# Altium PCB PCB3.PcbDoc
Units mil, origin at the board's own origin, x right, y up, seen from the top; angles counter-clockwise.
Board outline 397.64 x 1338.48 mil, 2 copper layers (Top Layer, Bottom Layer); 6 components, 15 nets, 6 pads, 0 vias.
Unrouted connection lines stored in the file: 3.
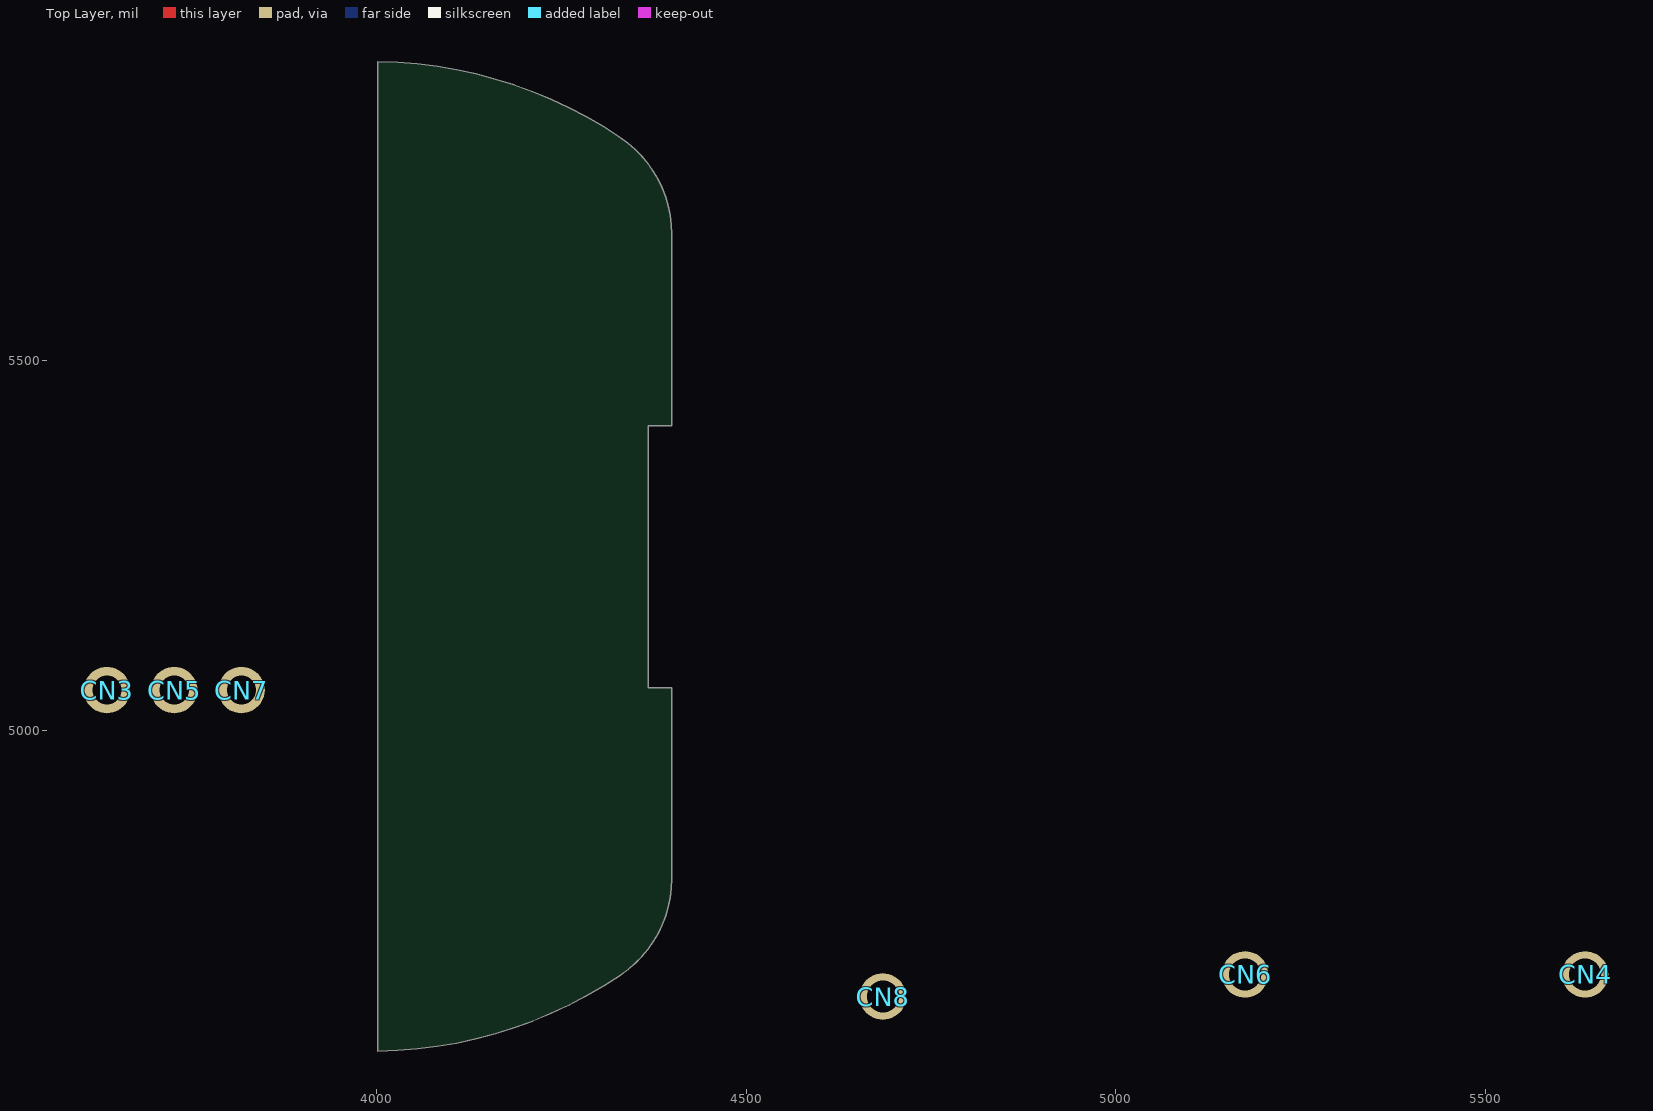
[diagram p0: Top Layer view]
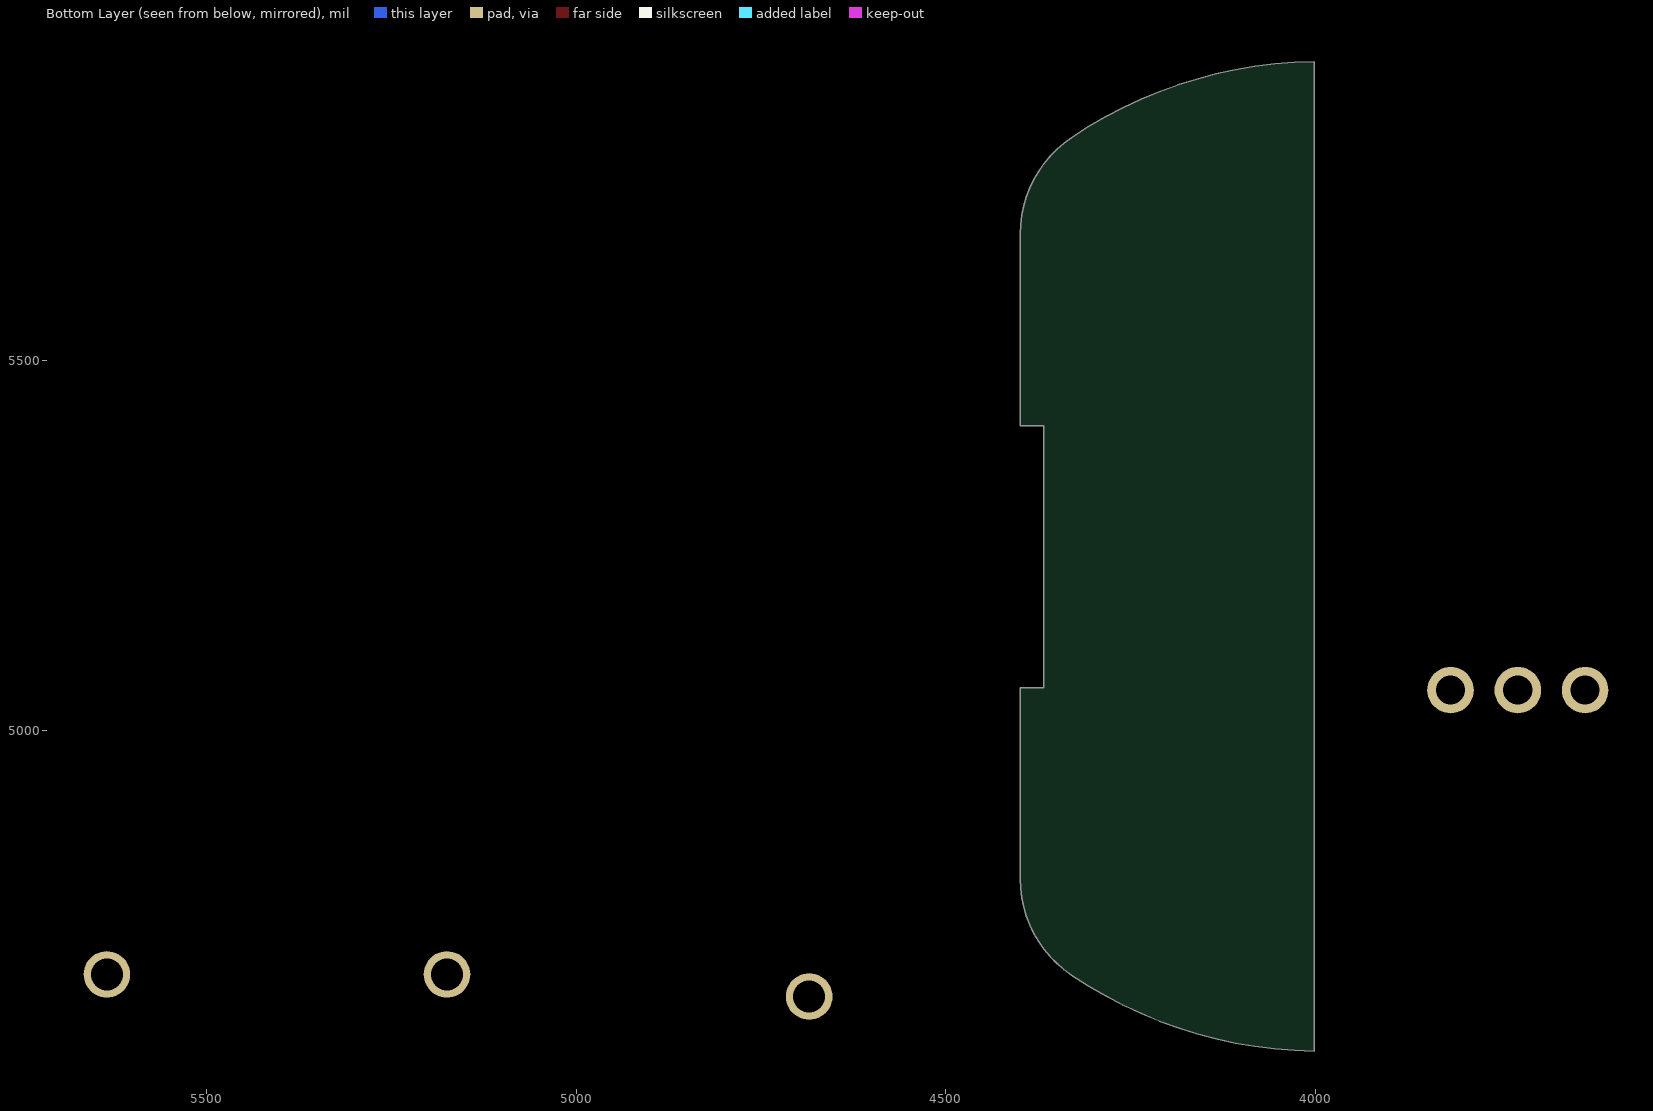
[diagram p1: Bottom Layer view, seen from below]

## Layer stack, top to bottom
Top Solder: solder mask 0.4, Solder Resist, Dk 3.5
Top Layer: signal copper 1.4
Dielectric 1: dielectric 12.6, FR-4, Dk 4.8
Bottom Layer: signal copper 1.4
Bottom Solder: solder mask 0.4, Solder Resist, Dk 3.5

## Board outline
4001.92,4566.14 4001.92,5904.62 cw(c3994.04,5303.83) 4330.18,5801.85 cw(c4242.08,5671.32) 4399.56,5671.32 4399.56,5412.35 4368.06,5412.35 4368.06,5058.02 4399.56,5058.02 4399.56,4799.44 cw(c4242.08,4799.44) 4330.18,4668.91 cw(c3994.04,5166.93)

## Design rules (kind name [scope] priority, off if disabled: settings)
Clearance [All] p1: gap=10 ignorepadtopadclearanceinfootprint=FALSE except(0: Arc-Hole Track-Hole SMDPad-Hole THPad-Hole Via-Hole Fill-Hole Poly-Hole Region-Hole Text-Hole)
PolygonConnect [All] p1: connectstyle=Relief reliefconductorwidth=10 reliefentries=4 polygonreliefangle="90 Angle" airgapwidth=10
RoomDefinition pocopin [InComponentClass('pocopin')] p1: confinementstyle=ConfineIn formatcopy=TRUE lockcomponents=FALSE outline 0,0 2000,0 2000,1000 0,1000
RoutingVias [All] p1: holewidth=28 width=50 viastyle="Through Hole" minholewidth=28 minwidth=50 maxholewidth=28 maxwidth=50
SolderMaskExpansion [All] p1: expansion=4
Width [All] p1: maxlimit=10 minlimit=10 preferedwidth=10
30 further rules are at their usual default settings.

## Components (designator, comment, footprint, x,y, rotation, side; value= is the part's Value field where it differs from the comment)
CN3 "PAD" PAD 3635.5,5054.5 r90 top
CN4 "POCOPIN" pocopin焊盘 5635,4670 r90 top
CN5 "PAD" PAD 3726.49,5054.5 r90 top
CN6 "POCOPIN" pocopin焊盘 5175,4670 r90 top
CN7 "PAD" PAD 3817.48,5054.5 r90 top
CN8 "POCOPIN" pocopin焊盘 4685,4640 r90 top

## Footprints (in the part's own frame and the unit in brackets; to place one, negate y for a bottom-side part, rotate by r counter-clockwise, add the part's x,y. Pads: shape width x height; smd on the part's side, far side on the other; paste and mask are expansions set on the pad)
PAD [mm]
  round 1.6 hole 1: 1(0,0)
pocopin焊盘 [mm]
  round 1.6 hole 1.1 mask+0.102: 1(0,0)

## Part data
CN3 CN4 CN5 CN6 CN7 CN8: JLCPCB Part Class="Extended Part", LCSC Part Name="POGO PIN弹簧顶针 贴片连接器", Manufacturer=YIYUAN(怡远), Manufacturer Part=YTC1P-3015-01, Rated Current=2.5A, Rated Voltage=12V, Add into BOM=yes, Contact Material=黄铜, Contact Plating=金, Convert to PCB=yes, Datasheet=https://atta.szlcsc.com/upload/public/pdf/source/20221031/BD070516233C1C93A35D01CFB419D0D5.pdf, Device=YTC1P-3015-01, Name=YTC1P-3015-01, Number of Pins=单PIN位, Overall Length/Height=4.5mm, Supplier=LCSC, Supplier Footprint=-, Supplier Part=C5221293, Symbol=YTC1P-3015-01, Type="弹簧顶针(POGO PIN)"

## Nets (pads, with @x,y where several pads share a name; then routed paths per layer and width w, separated by ;. In a path a pad name is that pad's centre, name@x,y a point inside that pad or via, vN(x,y) a via of type N, cw(c..) or ccw(c..) an arc to the next point about the centre after c; other vN are vias at no path point)
3V3: 
GND: 
NetCN3_1: CN3.1 CN4.1
NetCN5_1: CN5.1 CN6.1
NetCN7_1: CN7.1 CN8.1
PB4: 
PB5: 
PB6: 
PB7: 
PC4: 
PC5: 
PE2: 
PE3: 
PE6: 
PF10: 

## Silkscreen, mask and mechanical layers (free items; w line width, h text height)
Mechanical 1:
  circle w10: c4090.5,5235.38 r15.75
  circle w10: c4090.5,5353.49 r15.75
  circle w10: c4090.5,5117.27 r15.75
  circle w10: c4179.08,5117.27 r19.68
  circle w10: c4179.08,5235.38 r19.68
  circle w10: c4179.08,5353.49 r19.68
  circle w10: c4179.08,5778.69 r45.28
  circle w10: c4179.08,4692.07 r45.28
  lines w10: 4399.56,5058.02 4399.56,4799.44 cw(c4242.08,4799.44) 4330.18,4668.91 cw(c3994.04,5166.93) 4001.92,4566.14 4001.92,5904.62 cw(c3994.04,5303.83) 4330.18,5801.85 cw(c4242.08,5671.32) 4399.56,5671.32